# EAGLE board Schematic circuits (EAGLE 9.7.0)

Size 97.43 x 71.27 mm. Coordinates in mm from the lower left corner, seen from the top.
Outline: 0,0 97.43,0 97.43,71.27 0,71.27 0,0
Copper layers (1*16): Top 0.035mm / dielectric 1.5mm / Bottom 0.035mm
Design rules "default": minimum track width 6mil, minimum drill 0.35mm, track to track 6mil, track to pad 6mil, pad to pad 6mil, via to via 6mil, smd to smd 6mil, copper to edge 40mil, drill to drill 6mil, minimum pad ring 10mil, minimum via ring 8mil, stop-mask expansion 4mil, vias tented up to drill 0mil, thermal gap 10mil

## Footprints (pad centres in the part's own frame; a part is rotated, then mirrored left to right if it is on the bottom)
LEDRD254W60D565H860B = drill 0.981 pad 1.581: 1 -1.27,0; 2 1.27,0
LEDRD254W60D565H860B_O = drill 0.981 pad 1.581: 1 -1.27,0; 2 1.27,0
LEDRD254W60D565H860B_Y = drill 0.981 pad 1.581: 1 -1.27,0; 2 1.27,0
LEDRD254W60D565H860B_G = drill 0.981 pad 1.581: 1 -1.27,0; 2 1.27,0
LEDRD254W60D565H860B_B = drill 0.981 pad 1.581: 1 -1.27,0; 2 1.27,0
WS2812-STRIP = drill 1.016 long: 1 -3.81,0; 2 -1.27,0; 3 1.27,0; 4 3.81,0
BATTERY-GENERIC = drill 1.118 pad 3.15 octagon: + 2.54,0; - -2.54,0
RESAD1016W63L850D250B = drill 0.83 pad 1.43: 1 -5.08,0; 2 5.08,0
SWITCH-MOMENTARY-PTH-6.5MM = drill 1.016 pad 1.88: 1 -3.251,2.261; 2 3.251,2.261; 3 -3.251,-2.261; 4 3.251,-2.261
DIP787W55P254L958H533Q8B-8P3 = drill 0.852 pad 1.452: 1 -3.81,3.81; 2 -3.81,1.27; 3 -3.81,-1.27; 4 -3.81,-3.81; 5 3.81,-3.81; 6 3.81,-1.27; 7 3.81,1.27; 8 3.81,3.81

## Placement (x,y rotation side)
D1  RED  [LEDRD254W60D565H860B]  79.67,39.44 180 top
D2  ORANGE  [LEDRD254W60D565H860B_O]  84.75,36.9 180 top
D3  YELLOW  [LEDRD254W60D565H860B_Y]  79.67,34.36 180 top
D4  GREEN  [LEDRD254W60D565H860B_G]  84.75,31.82 180 top
D5  YELLOW  [LEDRD254W60D565H860B_Y]  89.83,39.44 180 top
D6  BLUE  [LEDRD254W60D565H860B_B]  89.83,34.36 180 top
LED1  WS2812B_STRIP  [WS2812-STRIP]  8.26,7.75 270 top
P1  BATTERYGENERIC  [BATTERY-GENERIC]  28.74,52.26 180 top
R1  10k  [RESAD1016W63L850D250B]  68.24,62.3 90 top
R2  470  [RESAD1016W63L850D250B]  80.94,47.06 90 top
R3  470  [RESAD1016W63L850D250B]  86.02,47.06 90 top
R4  470  [RESAD1016W63L850D250B]  91.1,47.06 90 top
S1  SWITCH_MOMENTARY  [SWITCH-MOMENTARY-PTH-6.5MM]  70.78,45.79 90 top
U1  ATtiny25-20PU  [DIP787W55P254L958H533Q8B-8P3]  56.81,45.79 90 top

## Library data of the parts
D1 = Tinkercad; CATEGORY: Opto-Electronic; SUB-CATEGORY: LED; VALUE: LED_RED
D2 = Tinkercad; CATEGORY: Opto-Electronic; SUB-CATEGORY: LED; VALUE: LED_ORANGE
D3 D5 = Tinkercad; CATEGORY: Opto-Electronic; SUB-CATEGORY: LED; VALUE: LED_YELLOW
D4 = Tinkercad; CATEGORY: Opto-Electronic; SUB-CATEGORY: LED; VALUE: LED_GREEN
D6 = Tinkercad; CATEGORY: Opto-Electronic; SUB-CATEGORY: LED; VALUE: LED_BLUE
LED1 P1 R1-R4 S1 = Tinkercad
U1 = Tinkercad; CATEGORY: IC_Embedded; CORE: AVR; DESCRIPTION: AVR AVR® ATtiny, Functional Safety (FuSa) Microcontroller IC 8-Bit 20MHz 2KB (1K x 16) FLASH 8-PDIP; MANUFACTURER: Microchip Technology; MPN: ATtiny25-20PU; OPERATING_TEMP: -40°C to 85°C; PART_STATUS: Active; ROHS_COMPLIANT: COMPLIANT; SERIES: ATtiny25; SPEED: 20 MHz; SUB-CATEGORY: Microcontroller; TYPE: AVR Microcontroller

## Nets
D1_A: D1.1 D3.1 R2.1
D2_A: D2.1 D4.1 R3.1
D5_A: D5.1 D6.1 R4.1
P1+: LED1.2 P1.+ R1.2 U1.8
P1-: D1.2 D2.2 D3.2 D4.2 D5.2 D6.2 LED1.3 P1.- S1.3 S1.4 U1.4
U1_PB0: R3.2 U1.5
U1_PB1: R2.2 U1.6
U1_PB2: R1.1 S1.1 S1.2 U1.7
U1_PB3: R4.2 U1.2
U1_PB4: LED1.1 U1.3

## Tracks (layer width: path | path; a pad name or v marks a point on that pad's centre or on a via)
D1_A  (2 unrouted)
D2_A  (2 unrouted)
D5_A  (2 unrouted)
P1+  (3 unrouted)
P1-  (10 unrouted)
U1_PB0  (1 unrouted)
U1_PB1  (1 unrouted)
U1_PB2  (3 unrouted)
U1_PB3  (1 unrouted)
U1_PB4  (1 unrouted)